# Altium PCB TL203蓝牙主板20529.PcbDoc (part 2 of 3)
Units mil, origin at the board's own origin, x right, y up, seen from the top; angles counter-clockwise.
Board outline 2775 x 2250 mil, 2 copper layers (Top Layer, Bottom Layer); 102 components, 86 nets, 328 pads, 438 vias.
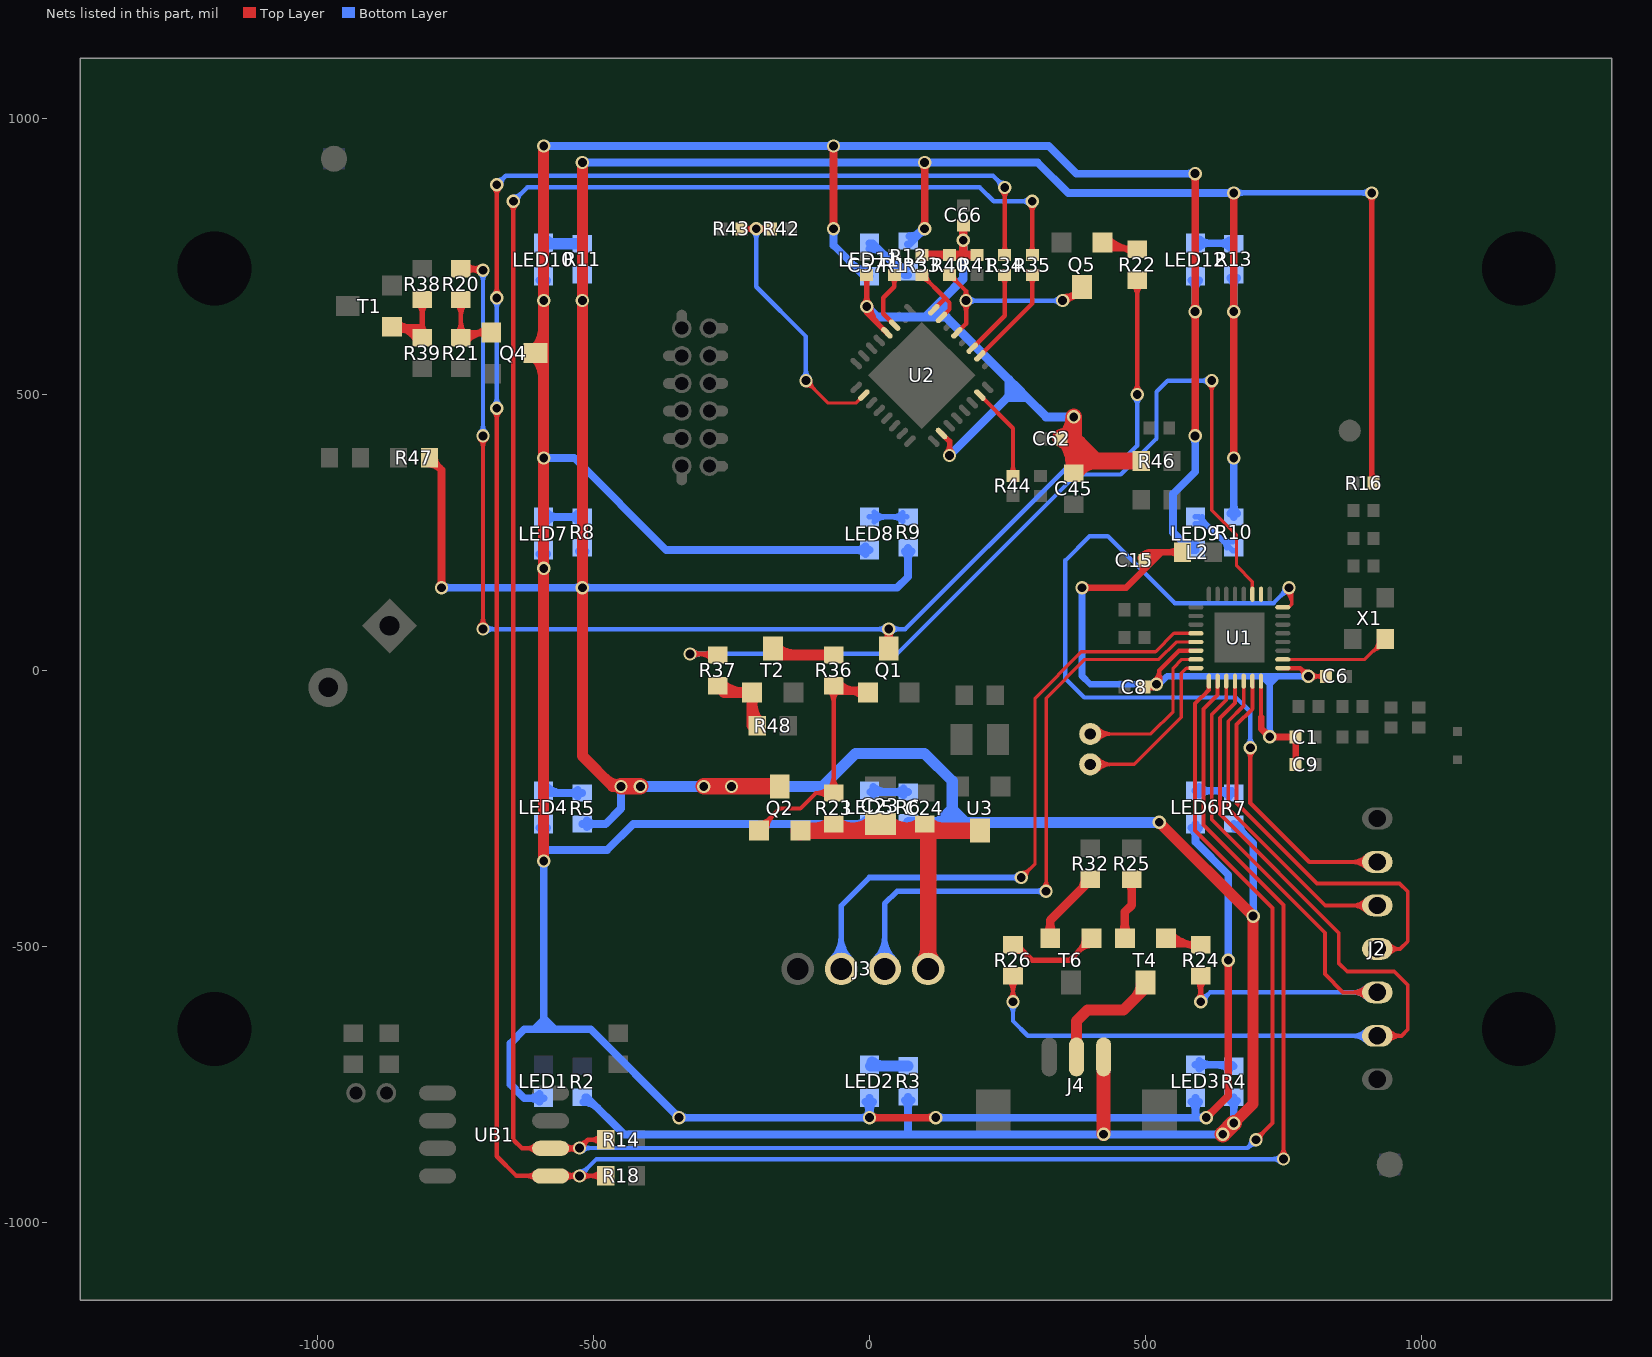
[diagram p2: the nets of this part, all layers, seen from the top]

## Via types
v1: diameter 16, hole 10, Top Layer to Bottom Layer, tented both sides, 357 vias
v2: diameter 24, hole 16, Top Layer to Bottom Layer, tented both sides, 81 vias

## Nets (pads, with @x,y where several pads share a name; then routed paths per layer and width w, separated by ;. In a path a pad name is that pad's centre, name@x,y a point inside that pad or via, vN(x,y) a via of type N, cw(c..) or ccw(c..) an arc to the next point about the centre after c; other vN are vias at no path point) (continued)
NetLED1_2: LED1.2 LED2.2 LED3.2 LED4.2 LED5.2 LED6.2 LED7.2 LED8.2 LED9.2 LED10.2 LED11.2 LED12.2 Q4.3 | length 8611.9
  Top Layer w14: v2@-68.54,946.46 cw(c-77.17,937.83) -64.96,937.83 ; v2@-68.5,803.54 ccw(c-77.03,812.07) -64.96,812.07 ccw(c-52.89,812.07) v2@-61.43,803.54 ; v2(-64.96,800) v2@-64.96,950 ; v2(0,-810) v2(120,-810) ; v2@3.54,-813.54 cw(c12.07,-822.07) 12.07,-810 cw(c12.07,-797.93) v2@3.54,-806.46 ; v2@116.46,-813.54 ccw(c107.93,-822.07) 107.93,-810 ccw(c107.93,-797.93) v2@116.46,-806.46 ; v2@586.46,428.54 ccw(c577.93,437.07) 590,437.07 ccw(c602.07,437.07) v2@593.54,428.54 ; v2@586.46,646.46 cw(c577.93,637.93) 590,637.93 cw(c602.07,637.93) v2@593.54,646.46 ; v2@586.46,653.54 ccw(c577.93,662.07) 590,662.07 ccw(c602.07,662.07) v2@593.54,653.54 ; v2@586.46,896.46 cw(c577.93,887.93) 590,887.93 cw(c602.07,887.93) v2@593.54,896.46 ; v2(590,425) v2(590,650) v2(590,900) ; v2(610,-810) 650,-770 v2(650,-525) ; v2@610,-805 ccw(c610,-792.93) 618.54,-801.46 ccw(c627.07,-810) v2@615,-810 ; v2@646.46,-528.54 cw(c637.93,-537.07) 650,-537.07 cw(c662.07,-537.07) v2@653.54,-528.54
  Top Layer w20: Q4.3@-607,569.34 cw(c-648.05,528.29) -590,528.29 ; Q4.3@-607,580.66 ccw(c-648.05,621.71) -590,621.71 ; v2(-590,-345) v2(-590,185) v2(-590,385) v2(-590,670) v2(-590,950)
  Bottom Layer w14: -616.88,-775 ccw(c-616.88,-747.77) LED1.2@-597.62,-767.02 ; -612.51,-775 cw(c-612.51,-796.05) LED1.2@-597.62,-781.17 ; LED4.2@-597.62,-285.1 cw(c-616.02,-303.5) -590,-303.5 ; LED7.2@-597.62,210.96 cw(c-616.02,192.56) v2@-590,192.56 ; LED10.2@-597.62,707.02 cw(c-614.69,689.95) -590.55,689.95 cw(c-566.41,689.95) LED10.2@-583.48,707.02 ; v2@-594.33,187.5 ccw(c-610.57,196.88) LED7.2@-592.46,201.73 ; v2@-593.54,-348.54 cw(c-602.07,-357.07) -590,-357.07 cw(c-577.93,-357.07) v2@-586.46,-348.54 ; v2@-593.54,-341.46 ccw(c-602.07,-332.93) -590,-332.93 ccw(c-577.93,-332.93) v2@-586.46,-341.46 ; v2@-593.54,188.54 ccw(c-602.07,197.07) -590,197.07 ccw(c-577.93,197.07) v2@-586.46,188.54 ; -590.55,683.4 ccw(c-576.6,683.4) v2@-586.46,673.54 ; LED10.2@-590.55,714.09 -590.55,670.55 v2(-590,670) ; LED1.2@-590,-775 -625,-775 -650,-750 -650,-675 -625,-650 -607.5,-650 ; -590,-300.84 cw(c-567.74,-300.84) LED4.2@-583.48,-285.1 ; LED4.2@-590,-278.58 -590,-325 ; v2(-590,185) LED7.2@-590,217.48 ; v2@-590,195.22 cw(c-567.74,195.22) LED7.2@-583.48,210.96 ; v2(-590,385) -535,385 -368.03,218.03 LED8.2@0,218.03 ; v2(-590,950) v2(-65,950) 325,950 375,900 v2(590,900) ; LED7.2@-588.2,201.92 ccw(c-571.49,197.44) v2@-585.85,187.79 ; v2@-586.46,381.46 cw(c-577.93,372.93) -577.93,385 cw(c-577.93,397.07) v2@-586.46,388.54 ; v2@-586.46,946.46 cw(c-577.93,937.93) -577.93,950 cw(c-577.93,962.07) v2@-586.46,953.54 ; -540,-650 -570,-650 ; v2@-350,-810 ccw(c-362.07,-810) -353.54,-801.46 ccw(c-345,-792.93) v2@-345,-805 ; v2@-341.46,-813.54 cw(c-332.93,-822.07) -332.93,-810 cw(c-332.93,-797.93) v2@-341.46,-806.46 ; v2@-68.54,946.46 ccw(c-77.07,937.93) -77.07,950 ccw(c-77.07,962.07) v2@-68.54,953.54 ; v2@-68.5,796.46 cw(c-77.03,787.93) -64.96,787.93 cw(c-52.89,787.93) v2@-61.43,796.46 ; v2(-64.96,800) -64.96,769.96 -9.09,714.09 LED11.2@0,714.09 ; v2@-61.46,946.46 cw(c-52.93,937.93) -52.93,950 cw(c-52.93,962.07) v2@-61.46,953.54 ; -32.6,737.6 ccw(c0,770.19) LED11.2@0,724.09 ; LED2.2@-7.07,-781.17 cw(c-24.14,-798.24) 0,-798.24 cw(c24.14,-798.24) LED2.2@7.07,-781.17 ; LED5.2@-7.07,-285.1 ccw(c-24.14,-302.17) -24.14,-278.03 ccw(c-24.14,-253.89) LED5.2@-7.07,-270.96 ; LED8.2@-7.07,210.96 ccw(c-24.14,193.89) -24.14,218.03 ccw(c-24.14,242.17) LED8.2@-7.07,225.1 ; v2@-4.25,-807.36 ccw(c-21.66,-796.56) -1.87,-791.26 ; v2@-3.54,-813.54 ccw(c-12.07,-822.07) -12.07,-810 ccw(c-12.07,-797.93) -3.54,-806.46 ccw(c-12.07,-797.93) 0,-797.93 ccw(c12.07,-797.93) v2@3.54,-806.46 ; LED2.2@0,-774.09 v2(0,-810) v2(-345,-810) -505,-650 -570,-650 ; LED5.2@0,-278.03 -428.03,-278.03 -475,-325 -590,-325 ; 1.87,-791.26 ccw(c21.66,-796.56) v2@4.25,-807.36 ; v2(120,-810) 590.55,-810 ; v2@123.54,-813.54 cw(c132.07,-822.07) 132.07,-810 cw(c132.07,-797.93) v2@123.54,-806.46 ; 558.83,241.17 ccw(c590.55,272.89) LED9.2@590.55,228.03 ; LED3.2@583.48,-781.17 cw(c566.41,-798.24) 590.55,-798.24 cw(c614.69,-798.24) LED3.2@597.62,-781.17 ; LED6.2@583.48,-285.1 cw(c566.41,-302.17) 590.55,-302.17 cw(c614.69,-302.17) LED6.2@597.62,-285.1 ; LED12.2@583.48,707.02 cw(c567.74,691.28) 590,691.28 ; v2@586.46,421.46 cw(c577.93,412.93) 590,412.93 cw(c602.07,412.93) v2@593.54,421.46 ; v2@586.46,653.54 ccw(c577.93,662.07) 590,662.07 ccw(c602.07,662.07) v2@593.54,653.54 ; v2@586.46,896.46 ccw(c577.93,887.93) 577.93,900 ccw(c577.93,912.07) v2@586.46,903.54 ; v2(590,425) 590,360 550,320 550,250 581.97,218.03 LED9.2@590.55,218.03 ; v2(590,650) LED12.2@590,713.54 ; 590,688.62 cw(c616.02,688.62) LED12.2@597.62,707.02 ; LED3.2@590.55,-774.09 590.55,-810 ; LED6.2@590.55,-278.03 590.55,-310.55 650,-370 v2(650,-525) ; v2@606.46,-813.54 ccw(c597.93,-822.07) 597.93,-810 ccw(c597.93,-797.93) v2@606.46,-806.46 ; v2(610,-810) 590.55,-810 ; v2@646.46,-521.46 ccw(c637.93,-512.93) 650,-512.93 ccw(c662.07,-512.93) v2@653.54,-521.46 ; -607.5,-650 -590,-650 ; -607.5,-650 -590,-632.5 ; -590,-650 -590,-632.5 ; -590,-650 -570,-650 ; -590,-632.5 -590,-630 ; -590,-630 -590,-600 v2(-590,-345) -590,-325 ; -590,-630 -570,-650
NetLED2_1: LED2.1 R3.1 | length 86.6
  Bottom Layer w20: LED2.1@2,-716.09 R3.1@70,-716.09 ; LED2.1@4.95,-709.14 ccw(c21.73,-692.37) 21.73,-716.09
NetLED3_1: LED3.1 R4.1 | length 133
  Bottom Layer w14: LED3.1@590.55,-714.09 657.09,-714.09 R4.1@660,-717 ; LED3.1@597.62,-721.17 cw(c614.69,-738.24) 614.69,-714.09 cw(c614.69,-689.95) LED3.1@597.62,-707.02 ; 629.9,-714.09 cw(c629.9,-745.13) R4.1@651.85,-723.19
NetLED4_1: LED4.1 R5.1 | length 129.4
  Bottom Layer w14: LED4.1@-586.58,-222 R5.1@-520,-222 ; LED4.1@-583.48,-210.96 ccw(c-556.83,-184.31) -556.83,-222 ; R5.1@-528.15,-228.19 ccw(c-543.09,-243.12) -543.09,-222 ccw(c-543.09,-200.88) R5.1@-528.15,-215.81
NetLED5_1: LED5.1 R6.1 | length 139.1
  Bottom Layer w14: LED5.1@2,-220.03 R6.1@70,-220.03 ; LED5.1@7.07,-225.1 cw(c19.31,-237.35) 19.31,-220.03 ; LED5.1@7.07,-210.96 ccw(c28.97,-189.06) 28.97,-220.03 ; R6.1@61.85,-226.22 ccw(c46.91,-241.15) 46.91,-220.03 ccw(c46.91,-198.91) R6.1@61.85,-213.85
NetLED6_1: LED6.1 R7.1 | length 136.2
  Bottom Layer w14: LED6.1@590.55,-218.03 656.03,-218.03 R7.1@660,-222 ; LED6.1@597.62,-225.1 cw(c614.69,-242.17) 614.69,-218.03 cw(c614.69,-193.89) LED6.1@597.62,-210.96 ; 627.33,-218.03 cw(c627.33,-252.7) R7.1@651.85,-228.19
NetLED7_1: LED7.1 R8.1 | length 136.6
  Bottom Layer w14: LED7.1@-590.55,278.03 R8.1@-525.03,278.03 ; LED7.1@-583.48,270.96 cw(c-566.41,253.89) -566.41,278.03 cw(c-566.41,302.17) LED7.1@-583.48,285.1 ; -543.16,278.03 cw(c-543.16,256.8) R8.1@-528.15,271.81 ; -543.01,278.03 ccw(c-543.01,299.04) R8.1@-528.15,284.19
NetLED8_1: LED8.1 R9.1 | length 154.3
  Bottom Layer w10: LED8.1@0,278.03 R9.1@68,278.03 ; LED8.1@8.49,269.55 cw(c28.97,249.06) 28.97,278.03 cw(c28.97,307) LED8.1@8.49,286.52 ; 42.01,278.03 cw(c42.01,251.98) R9.1@60.43,270.4 ; 42.16,278.03 ccw(c42.16,303.87) R9.1@60.43,285.6
NetLED9_1: LED9.1 R10.1 | length 181
  Bottom Layer w10: LED9.1@590.55,266.03 cw(c590.55,221.57) 621.99,253.01 ; LED9.1@590.55,278.03 596.97,278.03 658,217 R10.1@660,217 ; LED9.1@602.55,278.03 ccw(c616.03,278.03) LED9.1@606.5,268.5 ; 631.09,243.91 ccw(c658.03,270.84) R10.1@658.03,232.75 ; R10.1@643.24,231.76 cw(c633.48,222) R10.1@647.28,222
NetLED10_1: LED10.1 R11.1 | length 85.7
  Bottom Layer w20: LED10.1@-589.46,773 R11.1@-520,773 ; LED10.1@-585.6,779.04 ccw(c-571.01,793.64) -571.01,773
NetLED11_1: LED11.1 R12.1 | length 159.8
  Bottom Layer w14: LED11.1@0,764.09 cw(c0,725.7) 27.15,752.85 ; LED11.1@0,774.09 5.91,774.09 63.91,716.09 R12.1@70,716.09 ; 35.97,744.03 ccw(c68.03,776.09) R12.1@68.03,730.75
NetLED12_1: LED12.1 R13.1 | length 139.5
  Bottom Layer w14: LED12.1@590.55,774.09 R13.1@658.91,774.09 ; LED12.1@597.62,767.02 cw(c614.69,749.95) 614.69,774.09 cw(c614.69,798.24) LED12.1@597.62,781.17 ; 634.27,774.09 cw(c634.27,749.24) R13.1@651.85,766.81 ; 639.55,774.09 ccw(c639.55,791.48) R13.1@651.85,779.19
NetQ1_G: Q1.G Q2.G R23.2 R36.1 | length 849.3
  Top Layer w8: Q2.G@-202.4,-290 -162.4,-250 -125,-250 -97,-222 R23.2@-65,-222 R36.1@-65,-40 ; Q2.G@-199.8,-276 ccw(c-199.8,-248.47) -180.34,-267.94 ; Q2.G@-193.8,-290 cw(c-173.05,-290) Q2.G@-187.72,-275.32 ; Q2.G@-185.8,-290 cw(c-145.73,-290) -174.07,-261.67 ; R23.2@-75.28,-230.31 ccw(c-95.33,-250.36) -95.33,-222 ccw(c-95.33,-193.64) R23.2@-75.28,-213.69 ; R23.2@-73.31,-213.69 ccw(c-93.36,-193.64) -65,-193.64 ccw(c-36.64,-193.64) R23.2@-56.69,-213.69 ; R36.1@-73.31,-36.31 cw(c-93.36,-56.36) -65,-56.36 cw(c-36.64,-56.36) R36.1@-56.69,-36.31 ; R36.1@-66.04,-31.01 ccw(c-44.33,-9.29) -44.33,-40 ; R36.1@-65,-28 R36.1@-65,-40 ; R36.1@-60.38,-25.35 ccw(c-25.01,10.02) -25.01,-40 ; R36.1@-54.72,-19.69 ccw(c-5.7,29.33) Q1.G@-5.7,-40 ; -37.26,-31.54 ccw(c-27.76,3.92) Q1.G@-9.4,-27.88 ; -33.28,-32.61 cw(c-41.27,-62.44) Q1.G@-14.53,-47 ; Q1.G@-12.3,-49.9 ccw(c-36.2,-73.8) -36.2,-40 ccw(c-36.2,-6.2) Q1.G@-12.3,-30.1 ; Q1.G@-2.4,-40 R36.1@-65,-40
NetQ4_1: Q4.1 R20.1 R21.2 | length 346
  Top Layer w8: R21.2@-748.31,611.31 ccw(c-768.36,631.36) -740,631.36 ccw(c-711.64,631.36) R21.2@-731.69,611.31 ; R20.1@-748.31,663.69 cw(c-768.36,643.64) -740,643.64 cw(c-711.64,643.64) R20.1@-731.69,663.69 ; R21.2@-740,603 R21.2@-740,612.4 ; R20.1@-740,672 -740,637.5 R21.2@-740,612.4 ; R21.2@-735.38,600.35 cw(c-706.28,571.25) -706.28,612.4 ; R21.2@-729.72,594.69 cw(c-686.97,551.94) Q4.1@-686.97,612.4 ; Q4.1@-694.9,602.5 ccw(c-718.8,578.6) -718.8,612.4 ccw(c-718.8,646.2) Q4.1@-694.9,622.3 ; Q4.1@-685,612.4 R21.2@-740,612.4
NetQ5_1: Q5.1 R22.1 | length 242.4
  Top Layer w8: Q5.1@420.99,773.59 ccw(c446.48,798.98) 446.48,763 ; Q5.1@422.4,775 434.4,763 R22.1@485,763 cw(c485,837.35) Q5.1@432.32,784.88 ; Q5.1@426.65,779.23 ccw(c465.74,818.16) 465.74,763 ; R22.1@474.72,754.69 ccw(c454.67,734.64) 454.67,763 ccw(c454.67,791.36) R22.1@474.72,771.31
NetR1_1: R1.1 U2.27 | length 133.6
  Top Layer w8: R1.1@40.21,711.58 cw(c28.56,699.93) 45.04,699.93 cw(c61.52,699.93) R1.1@49.87,711.58 ; R1.1@45.04,716.41 45.04,695.04 25,675 25,646.21 U2.27@45.63,625.58
NetR24_1: R24.1 T4.B | length 203
  Top Layer w10: T4.B@537.4,-485 549.4,-497 R24.1@600,-497 ; T4.B@539.52,-482.88 ccw(c573.62,-448.79) 573.62,-497 ; T4.B@546.59,-475.81 ccw(c597.76,-424.64) R24.1@597.76,-497 ; R24.1@590.43,-504.6 ccw(c572.08,-522.95) 572.08,-497 ccw(c572.08,-471.05) R24.1@590.43,-489.4
NetR25_2: R25.2 T4.E | length 179.4
  Top Layer w16: T4.E@455.53,-477.93 ccw(c438.46,-460.86) 462.6,-460.86 ccw(c486.74,-460.86) T4.E@469.67,-477.93 ; T4.E@462.6,-485 462.6,-437.4 475,-425 R25.2@475,-378 ; R25.2@469.52,-383.48 cw(c456.29,-396.71) 475,-396.71 cw(c493.71,-396.71) R25.2@480.48,-383.48
NetR26_1: R26.1 T6.B | length 260.6
  Top Layer w10: R26.1@260,-497 267,-497 295,-525 362.4,-525 T6.B@402.4,-485 ; R26.1@261.97,-507.75 cw(c261.97,-545.84) 288.91,-518.91 ; R26.1@272.72,-497 ccw(c286.52,-497) R26.1@276.76,-506.76 ; T6.B@389.4,-485 cw(c358.02,-485) 380.21,-507.19 cw(c402.4,-529.38) T6.B@402.4,-498
NetR27_2: pad.TD U1.24 | length 416.5
  Top Layer w6: pad.TD@400,-170 480,-170 565,-85 565,-5 574.29,4.29 U1.24@591.3,4.29 ; pad.TD@407.78,-177.78 cw(c426.56,-196.56) 426.56,-170 cw(c426.56,-143.44) pad.TD@407.78,-162.22 ; pad.TD@412.02,-182.02 cw(c441.04,-211.04) 441.04,-170 cw(c441.04,-128.96) pad.TD@412.02,-157.98
NetR28_2: pad.RD U1.23 | length 399.8
  Top Layer w6: pad.RD@400,-115 510,-115 550,-75 550,4.13 565.91,20.04 U1.23@591.3,20.04 ; pad.RD@407.78,-122.78 cw(c426.56,-141.56) 426.56,-115 cw(c426.56,-88.44) pad.RD@407.78,-107.22 ; pad.RD@412.02,-127.02 cw(c441.04,-156.04) 441.04,-115 cw(c441.04,-73.96) pad.RD@412.02,-102.98
NetR32_2: R32.2 T6.E | length 202.1
  Top Layer w16: T6.E@320.53,-477.93 ccw(c303.46,-460.86) 327.6,-460.86 ccw(c351.74,-460.86) T6.E@334.67,-477.93 ; T6.E@327.6,-485 327.6,-452.4 R32.2@400,-380 ; 382,-398 ccw(c362,-378) R32.2@390.28,-378 ; R32.2@400,-385 R32.2@400,-380 ; R32.2@400,-378 R32.2@400,-380
NetR33_1: R33.1 U2.23 U2.24 | length 158.8
  Top Layer w8: R33.1@95.04,716.41 137.32,674.13 ; R33.1@96.02,709.58 cw(c96.02,695.48) 106,705.45 ; R33.1@102.85,716.41 ccw(c121.71,716.41) 108.37,703.08 ; U2.24@116.61,653.42 137.32,674.13 ; U2.23@130.53,639.5 145,653.97 145,666.45 137.32,674.13
NetR34_2: R34.2 U2.19 | length 182.8
  Top Layer w8: U2.19@186.21,583.82 245.04,642.65 R34.2@245.04,716.41 ; R34.2@240.21,711.58 cw(c228.56,699.93) 245.04,699.93 cw(c261.52,699.93) R34.2@249.87,711.58
NetR35_2: R35.2 U2.18 | length 211.7
  Top Layer w8: U2.18@200.13,569.9 295.04,664.81 R35.2@295.04,716.41 ; R35.2@290.21,711.58 cw(c278.56,699.93) 295.04,699.93 cw(c311.52,699.93) R35.2@299.87,711.58
NetR36_2: R36.2 T2.3 | length 142.5
  Top Layer w20: T2.3@-175,40 -163,28 R36.2@-75,28 ; T2.3@-169.34,42 ccw(c-135.54,75.81) -135.54,28
NetR37_2: R37.2 R48.2 T2.1 | length 276.8
  Top Layer w20: R37.2@-275,-28 -263,-40 T2.1@-212.4,-40 -212.4,-100 R48.2@-203,-100 ; R37.2@-268.97,-23.94 ccw(c-230.18,14.85) T2.1@-230.18,-40 ; T2.1@-218.06,-34.34 cw(c-231.72,-20.69) -231.72,-40 cw(c-231.72,-59.31) -218.06,-45.66 cw(c-231.72,-59.31) -212.4,-59.31 cw(c-193.09,-59.31) T2.1@-206.75,-45.66 ; -212.4,-61.46 ccw(c-166.42,-61.46) R48.2@-198.94,-93.97
NetR38_1: R38.1 R39.1 T1.1 | length 503.3
  Top Layer w10: T1.1@-857.06,612.31 cw(c-844.81,596.43) -839.62,615.8 cw(c-834.43,635.17) T1.1@-852.98,627.54 ; T1.1@-855.81,613.41 cw(c-833.62,591.21) -833.62,622.6 cw(c-833.62,653.98) T1.1@-855.81,631.79 ; T1.1@-855.72,613.5 cw(c-840.4,598.48) -834.85,619.2 ; T1.1@-853.74,629.1 ccw(c-839.94,637.07) -844.06,621.67 ; T1.1@-847.52,622.6 cw(c-847.52,582.11) R39.1@-812.61,602.62 ; -830.05,622.6 cw(c-830.05,592.38) R39.1@-803.99,607.69 ; R39.1@-821.24,597.55 ccw(c-865,571.84) T1.1@-865,622.6 -810,622.6 ; R39.1@-817.6,610.6 ccw(c-835.95,628.95) -810,628.95 ccw(c-784.05,628.95) R39.1@-802.4,610.6 ; R38.1@-817.6,664.4 cw(c-835.95,646.05) -810,646.05 cw(c-784.05,646.05) R38.1@-802.4,664.4 ; R39.1@-810,603 -810,622.6 ; R38.1@-810,672 -810,622.6 ; -810,622.6 cw(c-822.49,622.6) -815.78,612.06 ccw(c-822.49,622.6) -810,622.6 ; -810,622.6 ccw(c-797.51,622.6) -804.22,612.06 cw(c-797.51,622.6) -810,622.6
NetR42_1: R42.1 R43.2 U2.2 | length 766.7
  Top Layer w6: v2@-115,516 cw(c-115,494.27) -99.64,509.64 cw(c-84.27,525) v2@-106,525 ; v2(-115,525) -74.41,484.41 -24.56,484.41 U2.2@-10.05,498.91
  Top Layer w8: R43.2@-232,800 v2(-205,800) R42.1@-178,800 ; R43.2@-227.17,795.17 cw(c-215.52,783.52) -215.52,800 cw(c-215.52,816.48) R43.2@-227.17,804.83 ; -219.2,799.01 cw(c-217.53,792.76) -211.93,796 ccw(c-220.6,790.99) -218.01,800.67 ; -219.2,800.99 ccw(c-217.53,807.24) -211.93,804 cw(c-220.6,809.01) -218.01,799.33 ; v2@-210.66,794.34 ccw(c-224.31,780.69) -224.31,800 ccw(c-224.31,819.31) v2@-210.66,805.66 ; v2@-199.34,794.34 cw(c-185.69,780.69) -185.69,800 cw(c-185.69,819.31) v2@-199.34,805.66 ; -191.99,799.33 cw(c-189.4,809.01) -198.07,804 ccw(c-192.47,807.24) -190.8,800.99 ; -191.99,800.67 ccw(c-189.4,790.99) -198.07,796 cw(c-192.47,792.76) -190.8,799.01 ; R42.1@-182.83,795.17 ccw(c-194.48,783.52) -194.48,800 ccw(c-194.48,816.48) R42.1@-182.83,804.83
  Bottom Layer w8: v2@-210.66,794.34 cw(c-224.31,780.69) -205,780.69 cw(c-185.69,780.69) v2@-199.34,794.34 ; v2(-205,800) -205,695 -115,605 v2(-115,525) ; v2@-120.66,530.66 ccw(c-134.31,544.31) -115,544.31 ccw(c-95.69,544.31) v2@-109.34,530.66
NetR44_2: R44.2 U2.15 | length 197.2
  Top Layer w8: U2.15@200.13,498.91 260.04,439.01 R44.2@260.04,352.41 ; R44.2@255.21,357.24 ccw(c243.56,368.89) 260.04,368.89 ccw(c276.52,368.89) R44.2@264.87,357.24
NetU1_2: U1.2 X1.1 | length 266
  Top Layer w6: U1.2@748.78,20.04 897.6,20.04 X1.1@934.57,57.01 ; 909.44,31.89 cw(c934.57,6.76) X1.1@934.57,42.29 ; 914.2,36.64 ccw(c895.79,55.04) X1.1@921.82,55.04 ; X1.1@919.69,42.13 cw(c934.57,27.25) X1.1@934.57,48.29
P04/LED_RED: J2.3 R24.2 U1.27 | length 1374.1
  Top Layer w7: U1.27@646.42,-19.33 646.42,-53.58 620,-80 620,-270 825,-475 825,-550 858.11,-583.11 J2.3@920.04,-583.11 ; J2.3@900.72,-594.55 ccw(c873.09,-622.18) 873.09,-583.11 ccw(c873.09,-544.04) J2.3@900.72,-571.67 ; J2.3@905.67,-589.6 ccw(c889.99,-605.28) 889.99,-583.11 ccw(c889.99,-560.94) J2.3@905.67,-576.62
  Top Layer w10: R24.2@592.4,-560.6 cw(c574.05,-578.95) 600,-578.95 cw(c625.95,-578.95) R24.2@607.6,-560.6 ; v2@595.05,-595.05 ccw(c583.1,-583.1) 600,-583.1 ccw(c616.9,-583.1) v2@604.95,-595.05 ; v2(600,-600) R24.2@600,-553
  Bottom Layer w8: v2(600,-600) 616.89,-583.11 J2.3@920.04,-583.11 J2.3@911.93,-575 ; v2@600,-592 ccw(c600,-572.69) 613.66,-586.34 ccw(c627.31,-600) v2@608,-600 ; J2.3@901.07,-594.2 ccw(c874.3,-620.98) 874.3,-583.11 ccw(c874.3,-545.24) J2.3@901.07,-572.02
P05/LED_GREEN: J2.2 R26.2 U1.28 | length 1894.8
  Top Layer w7: U1.28@662.17,-19.33 662.17,-58.87 635,-86.03 635,-260 850,-475 850,-530 865.59,-545.59 950.59,-545.59 975.04,-570.04 975.04,-650.59 963.78,-661.85 ; J2.2@920.04,-661.85 963.78,-661.85 ; J2.2@934.8,-667.93 cw(c948.27,-679.81) 948.27,-661.85 cw(c948.27,-643.89) J2.2@934.8,-655.77 ; J2.2@940.05,-672.56 cw(c963.78,-693.49) 963.78,-661.85 ; J2.2@940.05,-651.14 ccw(c963.78,-630.21) 963.78,-661.85
  Top Layer w8: R26.2@251.69,-561.31 cw(c231.64,-581.36) 260,-581.36 cw(c288.36,-581.36) R26.2@268.31,-561.31 ; v2@254.34,-594.34 ccw(c240.69,-580.69) 260,-580.69 ccw(c279.31,-580.69) v2@265.66,-594.34 ; v2(260,-600) R26.2@260,-553
  Bottom Layer w8: v2@254.34,-605.66 cw(c240.69,-619.31) 260,-619.31 cw(c279.31,-619.31) v2@265.66,-605.66 ; v2(260,-600) 260,-635 286.85,-661.85 321.85,-661.85 J2.2@920.04,-661.85 ; J2.2@901.07,-672.94 ccw(c874.3,-699.72) 874.3,-661.85 ccw(c874.3,-623.98) J2.2@901.07,-650.76
P06/MOTO1: J2.5 U1.29 | length 681.2
  Top Layer w7: U1.29@677.91,-19.33 677.91,-64.16 650,-92.07 650,-250 825.63,-425.63 J2.5@920.04,-425.63 ; J2.5@900.72,-437.07 ccw(c873.09,-464.7) 873.09,-425.63 ccw(c873.09,-386.56) J2.5@900.72,-414.19 ; J2.5@905.67,-432.12 ccw(c889.99,-447.8) 889.99,-425.63 ccw(c889.99,-403.46) J2.5@905.67,-419.14
P07/MOTO0: J2.4 U1.30 | length 807.3
  Top Layer w7: U1.30@693.66,-19.33 693.66,-69.44 665,-98.11 665,-240 810.59,-385.59 960.04,-385.59 975.04,-400.59 975.04,-490.59 961.26,-504.37 ; J2.4@920.04,-504.37 961.26,-504.37 ; J2.4@940.63,-514.38 cw(c961.26,-530.63) 961.26,-504.37 ; J2.4@940.63,-494.36 ccw(c961.26,-478.11) 961.26,-504.37
PWR_CTL: R37.1 U1.11 | length 1837.7
  Top Layer w6: v2@613.64,518.64 cw(c598.27,503.27) 620,503.27 cw(c641.73,503.27) v2@626.36,518.64 ; v2(620,525) 620,290 665,245 665,189.45 693.66,160.79 U1.11@693.66,138.15
  Top Layer w8: v2(-325,30) -277,30 R37.1@-275,28 ; v2@-319.34,24.34 cw(c-305.69,10.69) -305.69,30 cw(c-305.69,49.31) v2@-319.34,35.66 ; -310.16,30 cw(c-310.16,-5.19) R37.1@-285.28,19.69 ; -300.5,30 ccw(c-300.5,51.53) R37.1@-285.28,36.31
  Bottom Layer w8: v2(-325,30) 50,30 375,355 455,355 520,420 520,505 540,525 v2(620,525) ; v2@-319.34,24.34 cw(c-305.69,10.69) -305.69,30 cw(c-305.69,49.31) v2@-319.34,35.66 ; v2@614.34,519.34 ccw(c600.69,505.69) 600.69,525 ccw(c600.69,544.31) v2@614.34,530.66
RED_LL: J4.2 T4.C | length 252.1
  Top Layer w20: J4.2@375,-700 375,-650 375,-635 395,-615 460,-615 500,-575 T4.C@500,-565 ; 481.86,-593.14 ccw(c457.36,-568.65) T4.C@492,-568.65
REMOTO: U1.10
RSTN: J2.6 U1.8 | length 1743.2
  Top Layer w6: U1.8@748.78,114.53 759.53,114.53 765,120 765,145 v2(760,150) ; v2@754.15,143.16 cw(c733.97,119.59) 765,119.59 ; v2@758.05,147.72 cw(c745.12,132.62) 765,132.62
  Top Layer w8: v2@684.34,-145.66 cw(c670.69,-159.31) 690,-159.31 cw(c709.31,-159.31) v2@695.66,-145.66 ; v2(690,-140) 690,-240 796.89,-346.89 J2.6@920.04,-346.89 ; J2.6@901.07,-357.98 ccw(c874.3,-384.76) 874.3,-346.89 ccw(c874.3,-309.02) J2.6@901.07,-335.8
  Bottom Layer w8: v2@684.34,-134.34 ccw(c670.69,-120.69) 690,-120.69 ccw(c709.31,-120.69) v2@695.66,-134.34 ; v2(690,-140) 690,-75 664,-49 389,-49 355,-15 355,199.41 398.59,243 432,243 552.9,122.1 732.1,122.1 v2(760,150) ; v2@752,150 cw(c732.69,150) 746.34,136.34 cw(c760,122.69) v2@760,142
RX2/SETKEY: J3.3 U1.21 | length 1292
  Top Layer w6: v2@313.64,-393.64 ccw(c298.27,-378.27) 320,-378.27 ccw(c341.73,-378.27) v2@326.36,-393.64 ; v2(320,-400) 320,-50 390,20 523.98,20 555.52,51.54 U1.21@591.3,51.54
  Bottom Layer w10: J3.3@10.18,-523.25 ccw(c-31.69,-481.38) 27.52,-481.38 ccw(c86.73,-481.38) J3.3@44.86,-523.25 ; J3.3@17.25,-530.32 ccw(c-7.55,-505.52) 27.52,-505.52 ccw(c62.59,-505.52) J3.3@37.79,-530.32 ; J3.3@27.52,-540.59 27.52,-422.48 50,-400 v2(320,-400) ; v2@315.05,-404.95 ccw(c303.1,-416.9) 303.1,-400 ccw(c303.1,-383.1) v2@315.05,-395.05
SCL: R14.2 R35.1 U1.25 UB1.6 | length 5555.2
  Top Layer w7: 610,-40 ccw(c599.17,-29.17) U1.25@614.48,-29.17 ; U1.25@614.92,-19.33 614.92,-35.08 590,-60 590,-290 730,-430 730,-820 v2(700,-850) ; v2@700,-841.5 ccw(c700,-820.98) 714.51,-835.49 ccw(c729.02,-850) v2@708.5,-850
  Top Layer w8: v2@-650.66,844.34 cw(c-664.31,830.69) -645,830.69 cw(c-625.69,830.69) v2@-639.34,844.34 ; v2(-645,850) -645,-850 -629.41,-865.59 UB1.6@-577.6,-865.59 ; UB1.6@-604.2,-872.51 ccw(c-620.89,-889.2) -620.89,-865.59 ccw(c-620.89,-841.98) UB1.6@-604.2,-858.68 ; UB1.6@-577.01,-865 UB1.6@-577.6,-865.59 ; UB1.6@-551,-872.51 cw(c-534.3,-889.2) -534.3,-865.59 cw(c-534.3,-841.98) UB1.6@-551,-858.68 ; UB1.6@-545.74,-865.59 ccw(c-545.74,-844.26) v2@-530.66,-859.34 ; -543.03,-867.93 cw(c-539.48,-881.17) v2@-530.34,-870.96 ; -542.89,-865.59 cw(c-542.89,-882.89) v2@-530.66,-870.66 ; -541.13,-863.76 ccw(c-538.8,-855.07) v2@-531.49,-860.33 ; -539.85,-867.08 ccw(c-543.22,-854.48) v2@-531.93,-861 ; -537.48,-864.74 cw(c-539.85,-873.57) v2@-531.93,-869 ; v2@-525,-857 ccw(c-525,-837.69) -511.34,-851.34 ccw(c-497.69,-865) v2@-517,-865 ; R14.2@-486.31,-858.31 ccw(c-506.36,-878.36) -506.36,-850 ccw(c-506.36,-821.64) R14.2@-486.31,-841.69 ; R14.2@-478,-850 -510,-850 v2(-525,-865) -525.59,-865.59 UB1.6@-577.6,-865.59 ; v2@289.34,844.34 cw(c275.59,830.59) 295.04,830.59 ; R35.1@290.21,757.24 ccw(c278.56,768.89) 295.04,768.89 ccw(c311.52,768.89) R35.1@299.87,757.24 ; R35.1@295.04,752.41 295.04,849.96 v2(295,850) ; 295.04,830.78 cw(c314.22,830.78) v2@300.66,844.34
  Bottom Layer w8: v2(-645,850) -620,875 200,875 225,850 v2(295,850) ; v2@-645,858 ccw(c-645,877.31) -631.34,863.66 ccw(c-617.69,850) v2@-637,850 ; v2(-525,-865) 685,-865 v2(700,-850) ; v2@-519.34,-870.66 cw(c-505.69,-884.31) -505.69,-865 cw(c-505.69,-845.69) v2@-519.34,-859.34 ; v2@289.34,844.34 ccw(c275.69,830.69) 275.69,850 ccw(c275.69,869.31) v2@289.34,855.66 ; v2@692,-850 cw(c672.69,-850) 686.34,-863.66 cw(c700,-877.31) v2@700,-858
SDA: R18.2 R34.1 U1.26 UB1.5 | length 5831
  Top Layer w7: U1.26@630.67,-19.33 630.67,-44.33 605,-70 605,-280 750,-425 v2(750,-885) ; v2@743.99,-878.99 ccw(c729.48,-864.48) 750,-864.48 ccw(c770.52,-864.48) v2@756.01,-878.99
  Top Layer w8: v2@-680.66,469.34 cw(c-694.31,455.69) -675,455.69 cw(c-655.69,455.69) v2@-669.34,469.34 ; v2@-680.66,680.66 ccw(c-694.31,694.31) -675,694.31 ccw(c-655.69,694.31) v2@-669.34,680.66 ; v2@-680.66,874.34 cw(c-694.31,860.69) -675,860.69 cw(c-655.69,860.69) v2@-669.34,874.34 ; v2(-675,475) -675,-880 -639.41,-915.59 UB1.5@-577.6,-915.59 v2(-525,-915.59) R18.2@-478.59,-915.59 ; v2(-675,675) v2(-675,880) ; UB1.5@-604.2,-922.51 ccw(c-620.89,-939.2) -620.89,-915.59 ccw(c-620.89,-891.98) UB1.5@-604.2,-908.68 ; UB1.5@-551,-922.51 cw(c-534.3,-939.2) -534.3,-915.59 cw(c-534.3,-891.98) UB1.5@-551,-908.68 ; -542.08,-917.67 cw(c-539.19,-928.44) v2@-530.93,-920.96 ; -542.08,-913.51 ccw(c-539.19,-902.74) v2@-530.93,-910.22 ; -538.66,-916.76 ccw(c-541.53,-906.04) v2@-531.93,-911.59 ; -538.66,-914.42 cw(c-541.53,-925.14) v2@-531.93,-919.59 ; v2@-530.66,-921.25 ccw(c-544.31,-934.9) -544.31,-915.59 ccw(c-544.31,-896.28) v2@-530.66,-909.93 ; v2@-519.34,-921.25 cw(c-505.69,-934.9) -505.69,-915.59 cw(c-505.69,-896.28) v2@-519.34,-909.93 ; -507.79,-915.59 ccw(c-507.79,-885.21) R18.2@-486.31,-906.69 ; -504.94,-915.59 cw(c-504.94,-941.94) R18.2@-486.31,-923.31 ; v2@239.34,869.34 cw(c225.59,855.59) 245.04,855.59 ; R34.1@240.21,757.24 ccw(c228.56,768.89) 245.04,768.89 ccw(c261.52,768.89) R34.1@249.87,757.24 ; R34.1@245.04,752.41 245.04,874.96 v2(245,875) ; 245.04,855.78 cw(c264.22,855.78) v2@250.66,869.34
  Bottom Layer w8: v2@-680.66,480.66 ccw(c-694.31,494.31) -675,494.31 ccw(c-655.69,494.31) v2@-669.34,480.66 ; v2@-680.66,669.34 cw(c-694.31,655.69) -675,655.69 cw(c-655.69,655.69) v2@-669.34,669.34 ; v2(-675,475) v2@-675,670 ; v2(-675,880) -658.87,896.13 223.87,896.13 v2(245,875) ; v2@-675,888 ccw(c-675,907.31) -661.34,893.66 ccw(c-647.69,880) v2@-667,880 ; v2(-525,-915.59) -494.41,-885 v2(750,-885) ; v2@-525,-907.59 ccw(c-525,-888.28) -511.34,-901.93 ccw(c-497.69,-915.59) v2@-517,-915.59 ; v2@237,875 ccw(c217.69,875) 231.34,888.66 ccw(c245,902.31) v2@245,883 ; v2@744.34,-890.66 ccw(c730.69,-904.31) 730.69,-885 ccw(c730.69,-865.69) v2@744.34,-879.34
TSM3V3: C45.1 C57.2 C62.2 C66.2 R33.2 R40.2 R41.2 R46.1 U2.10 U2.28 | length 1960.5
  Top Layer w10: v2@-9.91,664.36 ccw(c-21.86,676.31) -4.96,676.31 ccw(c11.94,676.31) v2@-0.01,664.36 ; C57.2@-9.08,712.29 cw(c-19.03,702.34) -4.96,702.34 cw(c9.11,702.34) C57.2@-0.84,712.29 ; v2@-7.96,659.41 ccw(c11.55,659.41) -2.25,645.61 ; C57.2@-4.96,716.41 v2(-4.96,659.41) -4.96,648.33 U2.28@31.71,611.66 ; v2@2.04,659.41 ccw(c45.69,659.41) 14.82,628.54 ; U2.10@130.53,429.32 145.04,414.81 v2(145.04,389.41) ; v2@140.09,394.36 ccw(c128.14,406.31) 145.04,406.31 ccw(c161.94,406.31) v2@149.99,394.36
  Top Layer w16: R33.2@95.04,752.41 R40.2@145.04,752.41 170.04,752.41 ; C66.2@170.04,806.41 170.04,752.41 ; R41.2@193.04,754.41 191.04,752.41 170.04,752.41
  Top Layer w20: C62.2@348.04,419.41 370.04,419.41 ; 370,441.37 v2@370,460
  Top Layer w30: C62.2@345.75,421.92 cw(c356.35,405.73) 370.04,419.41 ; C62.2@348.04,422.6 cw(c348.04,377.18) 380.15,409.3 ; C62.2@348.9,423.49 cw(c343.38,397.41) 370.04,397.41 ; C62.2@350.77,417.24 ccw(c314.26,459.41) v2(370.04,459.41) 370.04,419.41 ; C62.2@350.99,421.38 cw(c305,375.39) 370.04,375.39 ; C45.1@372.67,357.06 cw(c410.04,336.99) 410.04,379.41 ; R46.1@492.04,379.41 410.04,379.41 ; 370.04,379.41 370.04,419.41 ; 370.04,379.41 392.04,379.41 ; 370.04,379.41 C45.1@370.04,357.41 392.04,379.41 ; 370.04,419.41 410.04,379.41 ; 392.04,379.41 410.04,379.41
  Bottom Layer w16: v2(-4.96,659.41) 14.45,640 100.63,640 ; v2(145.04,389.41) 250.04,494.41 ; v2(170.04,779.41) 170.04,709.41 135.04,674.41 ; v2(370.04,459.41) 320.04,459.41 285.04,494.41 ; 100.63,640 120.04,659.41 ; 100.63,640 139.45,640 ; 120.04,659.41 135.04,674.41 ; 120.04,659.41 135.04,644.41 ; 135.04,644.41 139.45,640 ; 135.04,644.41 135.04,674.41 ; 139.45,640 252.54,526.91 ; 250.04,494.41 252.54,496.91 ; 250.04,494.41 285.04,494.41 ; 252.54,496.91 267.54,511.91 ; 252.54,496.91 252.54,526.91 ; 252.54,526.91 267.54,511.91 ; 267.54,511.91 285.04,494.41
TSM12_EN: Q5.3 R40.1 U2.21 | length 601
  Top Layer w8: R40.1@145.04,716.41 146.04,716.41 175,687.45 ; R40.1@146.02,709.58 cw(c146.02,693.06) 157.7,704.74 ; R40.1@152.85,716.41 ccw(c169.29,716.41) 157.67,704.78 ; U2.21@158.37,611.66 175,628.29 v2(175,670) 175,687.45 ; v2@169.34,664.34 cw(c155.69,650.69) 175,650.69 cw(c194.31,650.69) v2@180.66,664.34 ; v2@169.78,676.06 ccw(c159.97,687.45) 175,687.45 ; v2@180.22,676.06 cw(c190.03,687.45) 175,687.45 ; v2@350,678 ccw(c350,721.46) Q5.3@380.73,690.73 ; v2@354.83,676.38 ccw(c362.83,686.93) Q5.3@369.46,675.46 ; 363.68,673.68 ccw(c346.02,691.35) Q5.3@371,691.35 ; Q5.3@367.07,677.07 cw(c350,694.14) v2(350,670) v2@360,670 ; Q5.3@382.89,677.51 ccw(c378.86,651.14) v2@360,670 ; Q5.3@385,695 v2@360,670
  Bottom Layer w8: v2(175,670) v2(350,670) ; v2@180.66,664.34 cw(c194.31,650.69) 194.31,670 cw(c194.31,689.31) v2@180.66,675.66 ; v2@344.34,664.34 ccw(c330.69,650.69) 330.69,670 ccw(c330.69,689.31) v2@344.34,675.66
TX2: J3.2 U1.20 | length 1345.8
  Top Layer w6: v2(275,-375) 300,-350 300,-50 383.87,33.87 518.24,33.87 551.65,67.28 U1.20@591.3,67.28 ; v2@275,-366 ccw(c275,-344.27) 290.36,-359.64 ccw(c305.73,-375) v2@284,-375
  Bottom Layer w10: J3.2@-68.56,-523.25 ccw(c-110.43,-481.38) -51.22,-481.38 ccw(c7.99,-481.38) J3.2@-33.88,-523.25 ; J3.2@-61.49,-530.32 ccw(c-86.29,-505.52) -51.22,-505.52 ccw(c-16.15,-505.52) J3.2@-40.95,-530.32 ; J3.2@-51.22,-540.59 -51.22,-426.22 0,-375 v2(275,-375) ; v2@270.05,-379.95 ccw(c258.1,-391.9) 258.1,-375 ccw(c258.1,-358.1) v2@270.05,-370.05
UART_RD1: 
UART_TD1: 
V6V: J4.3 Q2.D R2.2 R3.2 R4.2 R5.2 R6.2 R7.2 R8.2 R9.2 R10.2 R11.2 R12.2 R13.2 R16.1 R47.2 | length 10005
  Top Layer w10: v2@905.05,860.05 cw(c893.1,848.1) 910,848.1 cw(c926.9,848.1) v2@914.95,860.05 ; 910,361.8 ccw(c934.44,361.8) R16.1@917.16,344.51 ; v2(910,865) 910,342.45 R16.1@913.04,339.41
  Top Layer w14: R47.2@-797,374.28 cw(c-797,348.41) -778.71,366.71 ; R47.2@-797,385 -775,363 v2(-775,150) ; R47.2@-788.25,383.03 ccw(c-771.88,383.03) R47.2@-783.46,371.46 ; v2@-778.54,153.54 ccw(c-787.07,162.07) -775,162.07 ccw(c-762.93,162.07) v2@-771.46,153.54 ; v2@96.46,803.54 ccw(c87.93,812.07) 100,812.07 ccw(c112.07,812.07) v2@103.54,803.54 ; v2@96.46,916.46 cw(c87.93,907.93) 100,907.93 cw(c112.07,907.93) v2@103.54,916.46 ; v2(100,800) v2(100,920) ; v2@656.46,388.54 ccw(c647.93,397.07) 660,397.07 ccw(c672.07,397.07) v2@663.54,388.54 ; v2@656.46,646.46 cw(c647.93,637.93) 660,637.93 cw(c672.07,637.93) v2@663.54,646.46 ; v2@656.46,653.54 ccw(c647.93,662.07) 660,662.07 ccw(c672.07,662.07) v2@663.54,653.54 ; v2@656.46,861.46 cw(c647.93,852.93) 660,852.93 cw(c672.07,852.93) v2@663.54,861.46 ; v2(660,385) v2(660,650) v2(660,865)
  Top Layer w20: v2(-520,920) v2(-520,670) v2(-520,150) -520,-155 -465,-210 v2(-450,-210) ; -479.02,-195.98 ccw(c-450,-166.96) v2@-450,-208 ; v2(525,-275) v2(695.04,-445.04) 695.04,-784.96 v2(660,-820)
  Top Layer w25: v2(424.21,-840) J4.3@424.21,-700
  Top Layer w30: v2(-450,-210) v2(-415,-210) ; v2(-300,-210) v2(-250,-210) Q2.D@-165,-210 ; v2(640,-840) v2(660,-820)
  Bottom Layer w10: v2(660,385) v2@660.59,384.41 ; v2(660,865) v2(910,865) ; v2@664.95,860.05 cw(c676.9,848.1) 676.9,865 cw(c676.9,881.9) v2@664.95,869.95 ; v2@905.05,860.05 ccw(c893.1,848.1) 893.1,865 ccw(c893.1,881.9) v2@905.05,869.95
  Bottom Layer w14: v2(-775,150) v2(-520,150) ; v2@-771.46,146.46 cw(c-762.93,137.93) -762.93,150 cw(c-762.93,162.07) v2@-771.46,153.54 ; R8.2@-526.19,215.81 cw(c-541.12,200.88) -520,200.88 cw(c-498.88,200.88) R8.2@-513.81,215.81 ; v2@-523.54,146.46 ccw(c-532.07,137.93) -532.07,150 ccw(c-532.07,162.07) -523.54,153.54 ccw(c-532.07,162.07) -520,162.07 ccw(c-507.93,162.07) -516.46,153.54 ccw(c-507.93,162.07) -507.93,150 ccw(c-507.93,137.93) v2@-516.46,146.46 ; R5.2@-520,-278 -478,-278 -450,-250 v2(-450,-210) ; R8.2@-520,222 v2(-520,150) ; v2(-520,920) v2(100,920) 305,920 360,865 v2(660,865) ; R2.2@-518.03,-781.75 cw(c-518.03,-817.43) -492.8,-792.2 ; v2@-516.46,916.46 cw(c-507.93,907.93) -507.93,920 cw(c-507.93,932.07) v2@-516.46,923.54 ; R2.2@-515,-773 -512,-773 -444.41,-840.59 70,-840.59 ; R5.2@-511.85,-284.19 cw(c-496.91,-299.12) -496.91,-278 cw(c-496.91,-256.88) R5.2@-511.85,-271.81 ; v2@-453.54,-213.54 cw(c-462.07,-222.07) -450,-222.07 cw(c-437.93,-222.07) v2@-446.46,-213.54 ; R3.2@63.81,-778.28 cw(c48.88,-793.21) 70,-793.21 cw(c91.12,-793.21) R3.2@76.19,-778.28 ; R9.2@63.81,215.81 cw(c48.88,200.88) 70,200.88 cw(c91.12,200.88) R9.2@76.19,215.81 ; R3.2@70,-772.09 70,-840.59 ; R9.2@70,222 70,170 50,150 v2(-520,150) ; R12.2@70,772.09 72.09,772.09 v2(100,800) ; R6.2@71.03,-275 R6.2@70,-276.03 R6.2@73.97,-280 ; R12.2@71.97,786.75 ccw(c71.97,822.43) v2@97.2,797.2 ; 87.92,791.84 ccw(c80.13,805.32) v2@95.17,801.29 ; v2@95,800 cw(c82.93,800) 91.46,791.46 cw(c100,782.93) v2@100,795 ; v2@96.46,916.46 ccw(c87.93,907.93) 87.93,920 ccw(c87.93,932.07) v2@96.46,923.54 ; v2@103.54,916.46 cw(c112.07,907.93) 112.07,920 cw(c112.07,932.07) v2@103.54,923.54 ; 410.72,-840.59 ccw(c410.72,-826.5) v2@420.68,-836.46 ; v2@427.75,-836.46 ccw(c437.71,-826.5) 437.71,-840.59 ; 626.5,-840.59 ccw(c626.5,-826.5) v2@636.46,-836.46 ; v2(640,-840) 639.41,-840.59 70,-840.59 ; R4.2@653.81,-779.19 cw(c638.88,-794.12) 660,-794.12 cw(c681.12,-794.12) R4.2@666.19,-779.19 ; R10.2@653.81,284.19 ccw(c638.88,299.12) 660,299.12 ccw(c681.12,299.12) R10.2@666.19,284.19 ; R13.2@653.81,710.81 cw(c638.88,695.88) 660,695.88 cw(c681.12,695.88) R13.2@666.19,710.81 ; v2@656.46,-816.46 ccw(c647.93,-807.93) 660,-807.93 ccw(c672.07,-807.93) v2@663.54,-816.46 ; v2@656.46,381.46 cw(c647.93,372.93) 660,372.93 cw(c672.07,372.93) v2@663.54,381.46 ; v2@656.46,653.54 ccw(c647.93,662.07) 660,662.07 ccw(c672.07,662.07) v2@663.54,653.54 ; v2@656.46,861.46 ccw(c647.93,852.93) 647.93,865 ccw(c647.93,877.07) v2@656.46,868.54 ; v2@660,-810 R4.2@660,-773 ; R7.2@660,-278 695,-313 v2@695,-445.04 ; R10.2@660,278 v2(660,385) ; v2(660,650) R13.2@660,717 ; R7.2@661.97,-286.75 cw(c661.97,-303.12) R7.2@673.54,-291.54 ; R7.2@670.72,-278 ccw(c696.59,-278) 678.29,-296.29 ; 695,-432.87 ccw(c707.21,-432.87) v2@698.57,-441.5
  Bottom Layer w20: v2(-520,670) R11.2@-520,717 ; v2(-450,-210) v2(-415,-210) v2(-300,-210) v2(-250,-210) -85,-210 -25,-150 100,-150 150,-200 150,-250 ; R6.2@71.03,-275 125,-275 ; R6.2@76.03,-280.1 cw(c88.34,-292.4) 88.34,-275 ; v2(525,-275) 173.97,-275 ; v2(640,-840) v2(660,-820) ; 125,-275 150,-250 ; 125,-275 150,-275 ; 150,-275 150,-251.03 ; 150,-275 173.97,-275 ; 150,-251.03 150,-250 ; 150,-251.03 173.97,-275
VBAT: C23.1 C24.1 J3.4 Q2.S R23.1 U3.3 | length 869.3
  Top Layer w30: Q2.S@-125,-292.6 -127.6,-290 C24.1@106.26,-290 ; -97.74,-290 ccw(c-97.74,-247.22) R23.1@-67.5,-277.47 ; R23.1@-62.5,-277.47 ccw(c-32.26,-247.22) -32.26,-290 ; -29.04,-290 ccw(c-29.04,-236.96) C23.1@8.46,-274.46 ; C23.1@31.54,-274.46 ccw(c69.04,-236.96) 69.04,-290 ; 67.26,-290 ccw(c67.26,-247.22) C24.1@97.5,-277.47 ; J3.4@95.99,-530.32 ccw(c71.19,-505.52) 106.26,-505.52 ccw(c141.33,-505.52) J3.4@116.53,-530.32 ; C24.1@100,-278 106.26,-284.26 C24.1@106.26,-290 ; C24.1@102.5,-277.47 ccw(c132.74,-247.22) 132.74,-290 ; J3.4@106.26,-540.59 C24.1@106.26,-290 ; U3.3@200,-290 C24.1@106.26,-290
VDD: C1.2 C6.2 C8.2 C9.2 C15.2 L2.1 U1.1 U1.22 U1.31 | length 2013
  Top Layer w7.87: v2@515.38,-18.39 ccw(c502.47,0.07) 525,0.07 ; v2@519.85,-16.94 ccw(c519.75,-11.69) 525,-11.69 525,0.07 ; U1.22@591.3,35.79 560.72,35.79 525,0.07 ; 709.41,-85 U1.31@709.41,-19.33 ; v2@724.7,-120.3 v2@725,-120.59 ; U1.1@748.78,4.29 780.16,4.29 v2(795.04,-10.59) C6.2@827.04,-10.59 ; v2@786.98,-10.59 ccw(c767.51,-10.59) 781.27,3.17 ccw(c795.04,16.94) v2@795.04,-2.53 ; v2@800.74,-16.29 cw(c814.5,-30.06) 814.5,-10.59 cw(c814.51,8.88) v2@800.74,-4.89 ; C6.2@822.17,-15.46 ccw(c810.41,-27.22) 810.41,-10.59 ccw(c810.41,6.04) C6.2@822.17,-5.72
  Top Layer w12: v2(385,150) 465,150 495,180 ; v2@389.24,145.76 cw(c399.49,135.51) 399.49,150 cw(c399.49,164.49) v2@389.24,154.24 ; C15.2@491.71,203.76 cw(c509.43,194.33) 509.43,214.41 ; 495,179.75 cw(c516.27,179.75) C15.2@501.41,194.97 ; C15.2@496.66,193.35 ccw(c500.26,211.71) 513.48,198.48 ; C15.2@498.04,205.22 ccw(c498.04,219.25) C15.2@507.96,209.33 ; C15.2@498.97,205.13 ccw(c505.48,238.34) 529.41,214.41 ; C8.2@501.41,-33.41 cw(c509.65,-41.65) 509.65,-30 cw(c509.65,-18.35) C8.2@501.41,-26.59 ; C8.2@501.55,-32.17 ccw(c495.9,-11.08) v2@514.8,-22 ; C15.2@502.3,198.13 cw(c529.41,183.7) 529.41,214.41 ; v2@515.2,-21.4 cw(c498,-8.5) C8.2@498,-30 520,-30 525,-25 525,-11.69 cw(c517.44,-11.69) v2@518.87,-19.11 ; L2.1@560.15,207.52 ccw(c543.51,190.88) 543.51,214.41 ccw(c543.51,237.94) L2.1@560.15,221.3 ; L2.1@567.04,214.41 529.41,214.41 ; 709.41,-85 709.41,-105 v2@724.7,-120.3 ; 713.75,-109.34 ccw(c725,-98.09) v2@725,-114 ; 715.17,-110.77 cw(c705.94,-120) v2@719,-120 ; v2@725,-120.59 C1.2@772.04,-120.59 C9.2@772.04,-170.59 ; v2@729.24,-124.24 cw(c738.06,-133.06) 738.06,-120.59 ; v2@729.24,-115.76 ccw(c740.91,-104.09) 740.91,-120.59 ; C9.2@768.63,-166.19 ccw(c760.39,-157.95) 772.04,-157.95 ccw(c783.69,-157.95) C9.2@775.45,-166.19 ; C1.2@768.63,-124.99 cw(c760.39,-133.23) 772.04,-133.23 cw(c783.69,-133.23) C1.2@775.45,-124.99 ; C1.2@768.63,-124 ccw(c760.39,-132.24) 760.39,-120.59 ccw(c760.39,-108.94) C1.2@768.63,-117.18 ; 495,180 495,196.37 C15.2@498.04,199.41 513.04,214.41 529.41,214.41 ; 495,180 529.41,214.41
  Bottom Layer w12: v2@380.76,145.76 cw(c370.51,135.51) 385,135.51 cw(c399.49,135.51) v2@389.24,145.76 ; v2(385,150) 385,-10 400,-25 525,-25 539.41,-10.59 710.59,-10.59 ; v2@515.76,-29.24 ccw(c505.51,-39.49) 505.51,-25 ccw(c505.51,-10.51) v2@515.76,-20.76 ; v2@520,-19 ccw(c520,7.56) 538.78,-11.22 ; v2@720.76,-115.76 ccw(c710.51,-105.51) 725,-105.51 ccw(c739.49,-105.51) v2@729.24,-115.76 ; v2(725,-120) 725,-25 ; v2@790.8,-14.83 ccw(c780.55,-25.08) 780.55,-10.59 ccw(c780.55,3.89) v2@790.8,-6.35 ; v2(795.04,-10.59) 739.41,-10.59 ; 710.59,-10.59 725,-25 ; 710.59,-10.59 725,-10.59 ; 725,-25 739.41,-10.59 ; 725,-25 725,-10.59 ; 725,-10.59 739.41,-10.59
  other v2: 520,-25
VDD3V3: Q1.D R20.2 R22.2 | length 2901.1
  Top Layer w8: R20.2@-740,728 -737,725 v2(-700,725) ; R20.2@-735.38,730.65 ccw(c-721.74,744.29) -721.74,725 ; R20.2@-729.72,719.69 cw(c-716.91,706.88) -716.91,725 ; R20.2@-729.72,736.31 ccw(c-702.43,763.6) v2@-702.43,725 ; -720.28,729.78 ccw(c-714.73,750.51) v2@-704,731.93 ; -717.35,729 cw(c-721.8,712.42) v2@-706.93,721 ; v2@-705.66,80.66 ccw(c-719.31,94.31) -700,94.31 ccw(c-680.69,94.31) v2@-694.34,80.66 ; v2@-705.66,419.34 cw(c-719.31,405.69) -700,405.69 cw(c-680.69,405.69) v2@-694.34,419.34 ; v2@-705.66,719.34 ccw(c-719.31,705.69) -719.31,725 ccw(c-719.31,744.31) v2@-705.66,730.66 ; v2(-700,75) v2(-700,425) ; Q1.D@25.66,54.08 ccw(c6.91,75) v2(35,75) ; v2@29.11,69.58 cw(c22.34,63.34) 31.24,60.95 cw(c40.14,58.57) v2@37.39,67.36 ; v2@29.34,69.34 cw(c15.69,55.69) 35,55.69 cw(c54.31,55.69) v2@40.66,69.34 ; v2@32.61,67.36 cw(c29.86,58.57) 38.76,60.95 cw(c47.66,63.34) v2@40.89,69.58 ; Q1.D@35,40 v2(35,75) ; Q1.D@44.34,54.08 cw(c63.09,75) v2(35,75) ; R22.2@476.69,698.69 cw(c456.64,678.64) 485,678.64 cw(c513.36,678.64) R22.2@493.31,698.69 ; v2@479.34,505.66 ccw(c465.69,519.31) 485,519.31 ccw(c504.31,519.31) v2@490.66,505.66 ; v2(485,500) R22.2@485,707
  Bottom Layer w8: v2@-705.66,430.66 ccw(c-719.31,444.31) -700,444.31 ccw(c-680.69,444.31) v2@-694.34,430.66 ; v2@-705.66,719.34 cw(c-719.31,705.69) -700,705.69 cw(c-680.69,705.69) v2@-694.34,719.34 ; v2(-700,75) v2(35,75) 65,75 360.87,370.87 448.42,370.87 485,407.45 v2(485,500) ; v2(-700,425) v2(-700,725) ; v2@-694.34,69.34 cw(c-680.69,55.69) -680.69,75 cw(c-680.69,94.31) v2@-694.34,80.66 ; v2@29.34,69.34 ccw(c15.69,55.69) 15.69,75 ccw(c15.69,94.31) v2@29.34,80.66 ; v2@40.66,69.34 cw(c54.31,55.69) 54.31,75 cw(c54.31,94.31) v2@40.66,80.66 ; v2@479.34,494.34 cw(c465.69,480.69) 485,480.69 cw(c504.31,480.69) v2@490.66,494.34
pads on no net: U1.9 U1.13 U2.8 U2.14 U2.17 UB1. UB1.3 UB1.7 Y1.3

## Polygon pours and split planes (outlines as drawn)
GND on Top Layer "Top Layer-No Net" (hatched 45Degree grid 11 track 15, remove dead copper, pour order 4): -1030,-1050 -1030,1028.51 1020,1028.51 1020,-1055 -1030,-1055 -1030,-1044.33
GND on Bottom Layer "Top Layer-No Net" (hatched 45Degree grid 11 track 15, remove dead copper, pour order 4): -1030,-1050 -1030,1028.51 1020,1028.51 1020,-1055 -1030,-1055 -1030,-1044.33

## Keep-outs
Keep-Out Layer:
  circle w5: c-1186.06,-649.61 r66.93
  circle w5: c1176.15,-649.61 r66.93
  circle w5: c1176.15,728.35 r66.93
  circle w5: c-1186.06,728.35 r66.93
  pour cut-out: -100,-475 -75,-450 50,-450 75,-475 75,-600 50,-625 -75,-625 -100,-600
  pour cut-out: 365,-90 365,-200 375,-210 425,-210 435,-200 435,-90 425,-80 375,-80
  pour cut-out: -970,-745 -970,-790 -955,-805 -850,-805 -835,-790 -835,-745 -850,-730 -955,-730
  pour cut-out: -425,280 160,280 225,345 225,420 -15,660 -80,660 -175,755 -410,755 -475,690 -475,330
  lines w5: -1178.56,956.23 -1294.33,956.14 -1294.33,-1044.33 1284.42,-1044.33 1284.42,956.14 1168.35,956.14 ; -1178.57,956.34 ccw(c-1186.06,1098.34) -1062.19,1028.51 1052.28,1028.51 ccw(c1176.15,1098.34) 1168.66,956.34

## Other copper
Top Layer:
  region net GND: 494.81,-329.9 516.8,-307.92 484.84,-275.96 462.85,-297.95
  rectangle net GND: 360,-322.08 497.08,-276.35
  rectangle net GND: 475,-875.83 582.63,-725
  rectangle net GND: 175,-880 273.41,-720
  region net NetBZ1_1: -869.32,350 -857.16,362.16 -887.83,392.83 -899.99,380.67
  region net NetBZ1_1: -869.32,350 -842.16,377.16 -865,400 -892.16,372.84
  rectangle net V6V: -195,-225 -135,-195
  region net V6V: -185,-235 -177.5,-227.5 -197.5,-207.5 -205,-215
  rectangle net V6V: -185,-235 -145,-220
  region net V6V: -197.93,-212.07 -177.93,-192.07 -185,-185 -205,-205
  rectangle net V6V: -185,-195 -145,-185
  region net V6V: -142.07,-202.07 -135,-195 -145,-185 -152.07,-192.07
  region net V6V: -145,-235 -135,-225 -142.5,-217.5 -152.5,-227.5
  region net VDD: 497.5,-22.5 512.5,-7.5 500,5 485,-10
  rectangle net GND: 70,600 91,630
  rectangle net GND: 68.25,630.05 95,670
  region net GND: 86.5,649.5 105,668 96.51,676.49 78.01,657.98
  rectangle net GND: 97,668 105,680
  rectangle net GND: 76,678 95,690
  region net GND: 98,673 105,680 95,690 88,683
  rectangle net GND: 63,646.5 85,690
  region net GND: 66.5,646.5 86.5,666.5 63,690 43,670
  rectangle net GND: 43,648 80,670
  region net GND: 104.94,586.06 126.94,608.06 65,670 43,648
  region net TSM3V3: 362.5,387.5 378.84,403.84 355.65,427.02 339.32,410.69
  region net TSM3V3: 367.61,397.39 384.36,414.14 356.75,441.75 340,425
  region net NetLED1_2: -597.5,522.5 -582.5,537.5 -615,570 -630,555
  region net NetLED1_2: -612.5,577.5 -582.5,607.5 -600,625 -630,595
  rectangle net NetLED1_2: -630,555 -585,595
  region net GND: 650,80 668.21,98.21 646.42,120 628.21,101.79
  rectangle net GND: -901.89,663.9 -845,750
  region net VDD: 525,-45 535,-35 527.93,-27.93 517.93,-37.93
  rectangle net VDD: 500,-35 535,5
  rectangle net VDD: 485,-45 525,-10
  rectangle net GND: 1008.75,-190.59 1025.04,-164.25
  rectangle net GND: -873.99,-985.07 -715,-900
  rectangle net GND: 1004.85,-190 1226.46,-165
  rectangle net GND: 900,170 980,305
  region net GND: 910,160 935.51,185.51 925.51,195.51 900,170
  rectangle net GND: 910,95 970.75,189.41
  region net GND: 850,35 894.01,79.01 879.01,94.01 835,50
  rectangle net GND: 890,85 975,105
  region net GND: 891.12,67.61 909.25,85.75 890,105 871.86,86.86
  rectangle net GND: 850,35 890,61.57
  region net GND: 890,35 900,45 885.86,59.14 875.86,49.14
  rectangle net GND: 880,45 900,90
  rectangle net GND: 95.04,576.17 135,615
  rectangle net GND: 320,739.5 383.1,817.11
  rectangle net GND: 850,-25 920.04,5
  rectangle net NetC2_1: 805,-75 865,-55
  region net NetL1_2: 765,-80 770,-75 747.5,-52.5 742.5,-57.5
  rectangle net NetL1_2: 747.32,-60.61 765,-50
  rectangle net NetL1_2: 765,-80 790,-50
  rectangle net NetC2_2: 885,-75 957,-56
  region net NetC2_2: 896.31,-86.31 912.58,-70.05 901.26,-58.74 885,-75
  region net NetC2_2: 891.54,-118.46 901.52,-108.48 893.04,-100 883.06,-109.98
  region net NetC2_2: 898.33,-115.3 903.33,-110.3 893.04,-100 888.04,-105
  rectangle net GND: 933,-125 1075,-92
  region net GND: 1075,-125 1091.5,-108.5 1075,-92 1058.5,-108.5
  region net VBAT: -135,-350 -150,-335 -150,-275 -140,-265 220,-265 230,-275 230,-320 150,-400 150,-575 140,-585 85,-585 75,-575 75,-375 50,-350
  region net GND: 795,-215.55 808.62,-229.17 865,-229.17 870,-225.97 870,-110 865,-105 800,-105 795,-110
  pour cut-out: 605.04,124.41 735.04,124.41 735.04,-5.59 605.04,-5.59
  pour cut-out: 245.04,609.41 245.04,484.41 220.04,484.41 220.04,609.41
  pour cut-out: 705,0 715,10 735,10 765,-20 1015,-20 1025,-10 1025,325 1035,335 1295,335 1295,-215 1045,-215 1035,-205 1035,-175 1025,-165 870,-165 855,-150 855,-105 850,-100 715,-100 705,-90
Bottom Layer:
  rectangle net GND: 5,534.41 65.04,594.45
  region net GND: 14.75,510.25 99.75,595.25 75,620 -10,535
  rectangle net GND: 75,595.25 110,620
  region net GND: 97.5,427.5 200,530 110,620 7.5,517.5
  rectangle net GND: 130.04,479.41 180.04,515

## Silkscreen, mask and mechanical layers (free items; w line width, h text height)
Top Overlay:
  circle w10: c-1186.06,-649.61 r141.73
  circle w10: c-1186.06,728.35 r141.73
  circle w10: c1176.14,728.35 r141.73
  circle w10: c1176.14,-649.61 r141.73
  lines w3.94: -1029.96,-1015.59 1020.04,-1015.59 1020.04,1015 -1029.96,1015 -1029.96,-1015.59
  text "JYD-TL203" at -929.96,859.41 h60
  text "20-5-29 V1.0" at -929.96,784.41 h30
  text "#" at -450,605 h30
  text "1" at -215,605 h30
  text "*" at -450,555 h30
  text "2" at -215,555 h30
  text "0" at -450,505 h30
  text "3" at -215,505 h30
  text "9" at -450,455 h30
  text "4" at -215,455 h30
  text "8" at -450,405 h30
  text "5" at -215,405 h30
  text "7" at -450,355 h30
  text "6" at -215,355 h30
  text "+" at -779.96,184.41 h50 r45
  text "RD" at 450,-135 h40
  text "TD" at 450,-200 h40
  text "GND" at 850,-245 h30 r180
  text "RS" at 850,-320 h30 r180
  text "P06" at 850,-400 h30 r180
  text "P07" at 850,-480 h30 r180
  text "P04" at 850,-560 h30 r180
  text "P05" at 850,-635 h30 r180
  text "G" at 340,-640 h30 r90
  text "R" at 395,-640 h30 r90
  text "V" at 445,-640 h30 r90
  text "GND" at -169.96,-715.59 h40 r270
  text "TX" at -79.96,-715.59 h40 r270
  text "RX" at 15.04,-715.59 h40 r270
  text "BAT" at 95.04,-715.59 h40 r270
  text "3V3" at 845.04,-715.59 h30 r180
Bottom Overlay:
  circle w137.8: c0,744.09 r55.12
  circle w5: c-590.55,744.09 r137.8
  circle w5: c0,744.09 r137.8
  circle w5: c0,248.03 r137.8
  circle w5: c-590.55,248.03 r137.8
  circle w5: c0,-248.03 r137.8
  circle w5: c-590.55,-248.03 r137.8
  circle w5: c-590.55,-744.09 r137.8
  circle w5: c0,-744.09 r137.8
  circle w5: c590.55,-744.09 r137.8
  circle w5: c590.55,-248.03 r137.8
  circle w5: c590.55,248.03 r137.8
  circle w5: c590.55,744.09 r137.8
  circle w137.8: c-590.55,744.09 r55.12
  circle w137.8: c590.55,744.09 r55.12
  circle w137.8: c0,248.03 r55.12
  circle w137.8: c-590.55,248.03 r55.12
  circle w137.8: c590.55,248.03 r55.12
  circle w137.8: c-590.55,-248.03 r55.12
  circle w137.8: c0,-248.03 r55.12
  circle w137.8: c590.55,-248.03 r55.12
  circle w137.8: c590.55,-744.09 r55.12
  circle w137.8: c0,-744.09 r55.12
  circle w137.8: c-590.55,-744.09 r55.12
  lines w5: -722.83,-972.44 720.47,-972.44 ccw(c720.47,-858.27) 834.65,-858.27 834.65,858.27 ccw(c720.47,858.27) 720.47,972.44 -720.47,972.44 ccw(c-720.47,858.27) -834.65,858.27 -834.65,-858.27 ccw(c-720.47,-858.27) -720.47,-972.44 ; -846.48,-866.15 ccw(c-728.37,-866.15) -728.37,-984.26 728.33,-984.26 ccw(c728.33,-866.15) 846.44,-866.15 846.44,866.13 ccw(c728.33,866.13) 728.33,984.24 -728.37,984.24 ccw(c-728.37,866.13) -846.48,866.13 -846.48,-866.15
Mechanical 1:
  text "工艺要求:" at -1304.96,1509.41 h100
  text "1> 板材:FR-4" at -1304.96,1309.41 h50
  text "4> 阻焊:顶层绿油" at -679.96,1309.41 h50
  text "7> 板框: Keep-out 层" at -4.96,1309.41 h50
  text "2> 板厚:1.6   mm" at -1304.96,1209.41 h50
  text "5> 阻焊:底面绿油" at -679.96,1209.41 h50
  text "3> 过孔:盖油" at -1304.96,1109.41 h50
  text "6> 字符:白色双面" at -679.96,1109.41 h50
Mechanical 2:
  lines w3.94: -866.14,-744.09 866.14,-744.09 ; -866.14,-248.03 866.14,-248.03 ; -866.14,248.03 866.14,248.03 ; -866.14,744.09 866.14,744.09 ; -590.55,-1023.62 -590.55,1023.62 ; 0,-1023.62 0,1023.62 ; 590.55,-1023.62 590.55,1023.62